# Altium PCB controller_V1.0.PcbDoc (part 2 of 8)
Units mm, origin at the board's own origin, x right, y up, seen from the top; angles counter-clockwise.
Board outline 284.13 x 175.13 mm, 4 copper layers (Top Layer, GND, VCC, Bottom Layer); 496 components, 415 nets, 1682 pads, 750 vias.
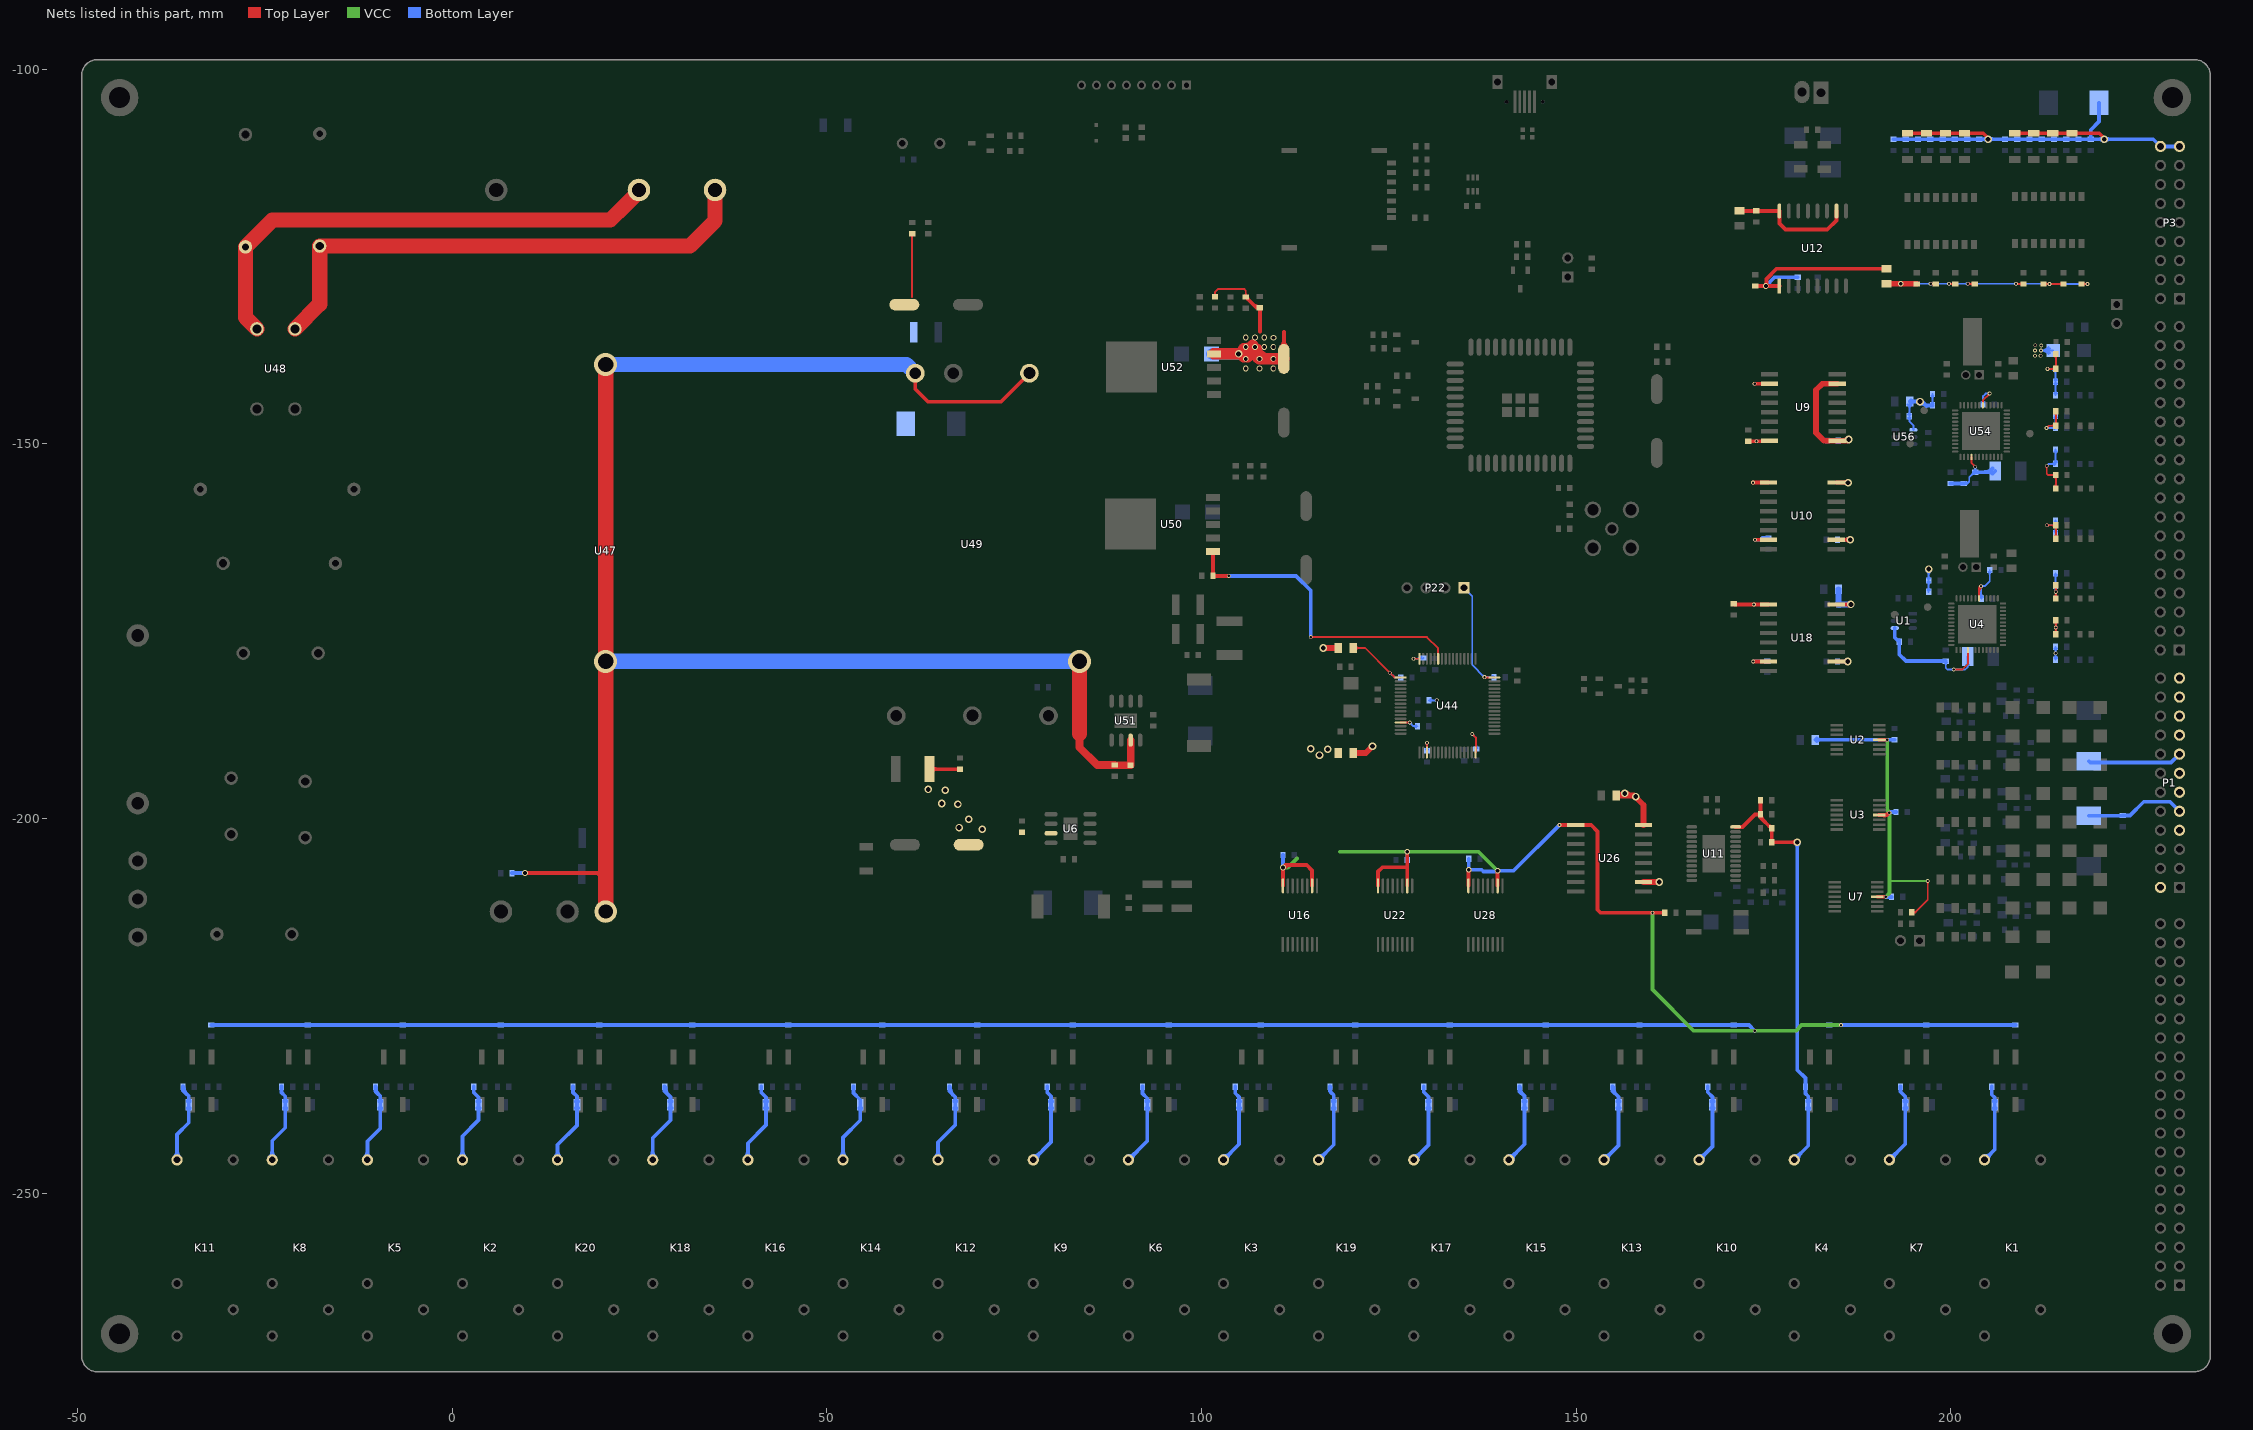
[diagram p4: the nets of this part, all layers, seen from the top]

## Via types
v1: diameter 0.508, hole 0.305, Top Layer to Bottom Layer, tented both sides, 596 vias
v2: diameter 1.016, hole 0.635, Top Layer to Bottom Layer, tented both sides, 65 vias
v3: diameter 0.6, hole 0.3, Top Layer to Bottom Layer, 50 vias
v4: diameter 0.762, hole 0.508, Top Layer to Bottom Layer, tented both sides, 29 vias
v5: diameter 2.032, hole 1.524, Top Layer to Bottom Layer, tented both sides, 4 vias
v6: diameter 3.048, hole 2.032, Top Layer to Bottom Layer, tented both sides, 3 vias
v7: diameter 1.5, hole 1, Top Layer to Bottom Layer, 2 vias
v8: diameter 2.54, hole 1.778, Top Layer to Bottom Layer, tented both sides, 1 vias

## Nets (pads, with @x,y where several pads share a name; then routed paths per layer and width w, separated by ;. In a path a pad name is that pad's centre, name@x,y a point inside that pad or via, vN(x,y) a via of type N, cw(c..) or ccw(c..) an arc to the next point about the centre after c; other vN are vias at no path point) (continued)
3.3V_ISO: C42.1 C57.1 C73.1 C146.2 C147.2 C161.2 C163.2 C166.2 D71.2 E147.1 FB5.1 FB6.1 FB7.2 R82.1 R87.1 R93.1 R97.1 R106.2 R107.2 R109.1 R114.1 R116.1 R118.1 R124.2 R127.2 R128.2 R131.2 R132.2 R135.2 R136.2 R139.2 R140.2 R142.2 R144.2 R147.2 R148.2 R150.2 R152.2 R154.2 R156.2 R158.2 R160.2 R184.2 R185.1 U9.10 U9.16 U10.1 U10.7 U16.10 U16.16 U18.1 U18.7 U22.10 U22.16 U26.1 U28.10 U28.16 U52.4 | length 478
  Top Layer w0.254: R184.2@101.651,-130.211 ccw(c101.27,-129.83) 101.809,-129.83 ccw(c102.347,-129.83) R184.2@101.966,-130.211 ; R184.2@101.809,-130.368 101.809,-129.712 102.21,-129.311 105.689,-129.311 105.915,-129.537 R185.1@105.915,-130.404 ; R185.1@105.758,-130.246 ccw(c105.377,-129.865) 105.915,-129.865 ccw(c106.454,-129.865) R185.1@106.073,-130.246 ; R97.1@195.497,-128.655 R97.1@195.501,-128.651 ; v1@197.339,-128.651 R93.1@198.016,-128.651 ; v1@197.422,-128.529 ccw(c197.716,-128.235) R93.1@197.716,-128.651 ; R93.1@197.783,-128.809 ccw(c197.402,-129.189) 197.402,-128.651 ccw(c197.402,-128.113) R93.1@197.783,-128.493 ; v1(199.771,-128.619) 199.803,-128.651 R87.1@200.607,-128.651 ; v1@199.861,-128.529 ccw(c200.155,-128.235) 200.155,-128.651 ; R87.1@200.374,-128.809 ccw(c199.993,-129.189) 199.993,-128.651 ccw(c199.993,-128.113) R87.1@200.374,-128.493 ; v1(202.286,-128.619) 203.165,-128.619 R82.1@203.197,-128.651 ; v1@202.375,-128.709 cw(c202.592,-128.926) 202.592,-128.619 cw(c202.592,-128.312) v1@202.375,-128.529 ; v1@202.507,-128.619 cw(c202.507,-129.267) R82.1@202.965,-128.809 ; 202.661,-128.619 ccw(c202.661,-128.19) R82.1@202.965,-128.493 ; v1@208.75,-128.651 R118.1@209.725,-128.651 ; v1@208.808,-128.529 ccw(c209.102,-128.235) 209.102,-128.651 ; R118.1@209.493,-128.809 ccw(c209.112,-129.189) 209.112,-128.651 ccw(c209.112,-128.113) R118.1@209.493,-128.493 ; R116.1@212.392,-128.651 v1(213.208,-128.651) R114.1@215.059,-128.651 ; R116.1@212.625,-128.809 cw(c213.006,-129.189) 213.006,-128.651 cw(c213.006,-128.113) R116.1@212.625,-128.493 ; v1@213.118,-128.741 ccw(c212.901,-128.958) 212.901,-128.651 ccw(c212.901,-128.344) v1@213.118,-128.561 ; v1@213.297,-128.741 cw(c213.514,-128.958) 213.514,-128.651 cw(c213.514,-128.344) v1@213.297,-128.561 ; R114.1@214.827,-128.809 ccw(c214.446,-129.189) 214.446,-128.651 ccw(c214.446,-128.113) R114.1@214.827,-128.493 ; R109.1@217.472,-128.651 v1(218.262,-128.651) ; R109.1@217.705,-128.809 cw(c218.086,-129.189) 218.086,-128.651 cw(c218.086,-128.113) R109.1@217.705,-128.493 ; v1@218.172,-128.741 ccw(c217.956,-128.958) 217.956,-128.651 ccw(c217.956,-128.344) v1@218.172,-128.561
  Top Layer w0.508: R185.1@105.915,-130.404 107.339,-131.827 C146.2@107.795,-131.827 107.795,-135.029 ; R185.1@106.086,-130.404 ccw(c106.499,-130.404) R185.1@106.207,-130.696 ; 106.906,-131.394 ccw(c107.72,-130.58) C146.2@107.72,-131.731 ; E147.1@110.636,-137.053 ccw(c109.769,-136.186) 110.995,-136.186 ccw(c112.222,-136.186) E147.1@111.355,-137.053 ; U16.16@110.868,-208.989 v4(110.868,-206.555) 111.227,-206.197 114.046,-206.197 114.768,-206.92 U16.10@114.768,-208.989 ; v4@110.958,-206.645 cw(c112.04,-207.727) 112.04,-206.197 ; E147.1@110.995,-138.65 110.995,-135.028 ; U22.16@123.568,-208.989 123.568,-207.089 124.155,-206.502 127.468,-206.502 ; U22.10@127.468,-208.989 127.468,-206.502 ; v4(127.468,-204.433) 127.468,-206.502 ; U28.16@135.633,-208.989 v4@135.633,-206.886 ; 135.633,-207.268 cw(c136.122,-207.268) v4@135.777,-206.922 ; U28.10@139.533,-208.989 v4(139.533,-206.973) ; v1(147.777,-200.863) U26.1@149.959,-200.863 152.019,-200.863 152.883,-201.727 152.883,-212.192 153.264,-212.573 v1(160.198,-212.573) R106.2@161.847,-212.573 ; C166.2@171.119,-171.425 U18.1@175.689,-171.425 ; C166.2@171.184,-171.279 ccw(c171.535,-170.928) 171.535,-171.425 ; C163.2@172.974,-149.633 U9.16@175.764,-149.633 ; v1(173.634,-155.169) U10.1@175.689,-155.169 ; v1(173.66,-179.045) U18.7@175.689,-179.045 ; v1(173.838,-141.961) U9.10@175.816,-141.961 ; v1(173.888,-162.789) U10.7@175.689,-162.789
  Top Layer w0.762: v2(116.256,-177.241) FB6.1@118.237,-177.241 ; FB7.2@191.44,-128.619 v4(193.345,-128.619) R97.1@195.461,-128.619
  Top Layer w1.524: U52.4@101.648,-137.983 v2(104.953,-137.983) ; v2@105.227,-137.983 cw(c105.227,-139.342) 106.187,-138.381 ; 105.615,-137.29 ccw(c107.018,-136.218) 107.018,-137.983 ; 105.649,-138.381 cw(c106.609,-139.342) 106.609,-137.983 ; 105.832,-137.983 ccw(c105.832,-135.746) 107.414,-137.328 ; 106.244,-137.256 cw(c104.953,-136.473) v2(104.953,-137.983) ; 106.834,-136.837 ccw(c107.498,-137.31) 106.922,-137.887 ; E147.1@110.995,-138.65 108.839,-138.65 107.685,-138.65 107.447,-138.412 107.018,-137.983 ; v2(104.953,-137.983) 107.018,-137.983 ; 107.066,-137.983 cw(c107.066,-139.342) 108.027,-138.381 ccw(c107.066,-139.342) 107.066,-137.983
  VCC w0.508: v4(110.868,-206.555) 111.529,-206.555 112.751,-205.334 ; 118.451,-204.433 v4(127.468,-204.433) 136.993,-204.433 v4(139.533,-206.973) ; v1(160.198,-212.573) 160.198,-222.834 165.71,-228.346 v1(173.863,-228.346) 179.349,-228.346 180.113,-227.583 v1(185.369,-227.583)
  Bottom Layer w0.254: v4(193.345,-128.619) v1(197.333,-128.619) v1(199.771,-128.619) v1(202.286,-128.619) v1(208.718,-128.619) 213.176,-128.619 v1(213.208,-128.651) v1(218.262,-128.651) ; v1@197.243,-128.709 ccw(c197.026,-128.926) 197.026,-128.619 ccw(c197.026,-128.312) v1@197.243,-128.529 ; v1@197.422,-128.709 cw(c197.639,-128.926) 197.639,-128.619 cw(c197.639,-128.312) v1@197.422,-128.529 ; v1@199.681,-128.709 ccw(c199.464,-128.926) 199.464,-128.619 ccw(c199.464,-128.312) v1@199.681,-128.529 ; v1@199.861,-128.709 cw(c200.078,-128.926) 200.078,-128.619 cw(c200.078,-128.312) v1@199.861,-128.529 ; v1@202.196,-128.709 ccw(c201.979,-128.926) 201.979,-128.619 ccw(c201.979,-128.312) v1@202.196,-128.529 ; v1@202.375,-128.709 cw(c202.592,-128.926) 202.592,-128.619 cw(c202.592,-128.312) v1@202.375,-128.529 ; v1@208.629,-128.709 ccw(c208.412,-128.926) 208.412,-128.619 ccw(c208.412,-128.312) v1@208.629,-128.529 ; v1@208.808,-128.709 cw(c209.025,-128.926) 209.025,-128.619 cw(c209.025,-128.312) v1@208.808,-128.529 ; 212.824,-128.619 cw(c212.824,-129.035) v1@213.118,-128.741 ; v1@213.297,-128.741 cw(c213.514,-128.958) 213.514,-128.651 cw(c213.514,-128.344) v1@213.297,-128.561 ; v1@218.172,-128.741 ccw(c217.956,-128.958) 217.956,-128.651 ccw(c217.956,-128.344) v1@218.172,-128.561
  Bottom Layer w0.508: R148.2@-32.159,-227.583 R144.2@-19.296,-227.583 R140.2@-6.632,-227.583 R136.2@6.484,-227.583 R132.2@19.603,-227.583 R128.2@32.029,-227.583 R124.2@44.825,-227.583 R160.2@57.383,-227.583 R158.2@70.044,-227.583 R156.2@82.832,-227.583 R154.2@95.646,-227.583 R152.2@107.901,-227.583 R150.2@120.511,-227.583 R147.2@133.147,-227.583 R142.2@145.941,-227.583 R139.2@158.47,-227.583 R135.2@171.031,-227.583 173.1,-227.583 v1(173.863,-228.346) ; v4@110.896,-206.527 C73.1@110.896,-204.876 ; C57.1@127.457,-205.537 127.468,-205.526 v4(127.468,-204.433) ; C42.1@135.687,-205.384 v4(135.687,-206.832) 137.414,-206.832 137.643,-207.061 139.446,-207.061 v4(139.533,-206.973) 141.667,-206.973 v1(147.777,-200.863) ; 139.016,-207.061 ccw(c139.016,-206.456) v4@139.444,-206.884 ; v1(173.66,-179.045) 173.687,-179.018 C161.2@175.539,-179.018 ; v1(173.888,-162.789) 174.635,-162.789 174.865,-162.559 C147.2@175.689,-162.559 ; R127.2@183.779,-227.583 v1(185.369,-227.583) R131.2@196.745,-227.583 R107.2@208.649,-227.583
  Bottom Layer w1.524: D71.2@101.358,-137.998 v2@104.785,-137.998
  other v1: 173.736,-171.425 174.092,-149.633
  other v2: 115.748,-191.541 116.865,-190.754 114.579,-190.678
  other v4: 105.918,-139.929 107.758,-139.929 109.597,-139.929 105.918,-138.65 107.758,-138.65 109.597,-138.65 105.918,-137.058 107.144,-137.058 108.371,-137.058 109.597,-137.058 109.601,-135.839 105.918,-135.788 107.144,-135.788 108.371,-135.788
3.3V_ISO_AD: D72.2 R191.2 R192.2 R193.2 R194.2 R195.2 R196.2 R197.2 R202.2 R203.2 R204.2 R205.2 R206.2 R207.2 R208.2 R209.2 R214.2 R215.2 R216.2 R217.2 R218.2 R219.2 R220.2 R221.2 R246.2 | length 74.1
  Top Layer w0.254: v1@212.737,-152.998 cw(c212.52,-153.215) 212.827,-153.215 cw(c213.133,-153.215) v1@212.916,-152.998 ; v1(212.801,-147.879) 213.106,-147.574 R204.2@214.042,-147.574 R205.2@214.042,-145.644 ; v1@212.801,-147.752 ccw(c212.801,-147.445) 213.018,-147.662 ccw(c213.235,-147.879) v1@212.928,-147.879 ; v1(212.827,-160.858) R195.2@214.042,-160.858 R194.2@214.042,-162.636 ; v1(212.827,-152.908) 212.827,-153.975 213.004,-154.153 R221.2@214.042,-154.153 R220.2@214.042,-155.956 ; v1@212.916,-160.948 cw(c213.133,-161.165) 213.133,-160.858 cw(c213.133,-160.552) v1@212.916,-160.768 ; v1(212.928,-139.979) R192.2@214.042,-139.979 R193.2@214.042,-137.998 ; v1@213.018,-140.069 cw(c213.235,-140.286) 213.235,-139.979 cw(c213.235,-139.673) v1@213.018,-139.89 ; R218.2@213.884,-175.18 ccw(c213.503,-174.799) 214.042,-174.799 ccw(c214.58,-174.799) R218.2@214.199,-175.18 ; R219.2@213.884,-173.791 cw(c213.503,-174.172) 214.042,-174.172 cw(c214.58,-174.172) R219.2@214.199,-173.791 ; R206.2@213.884,-170.405 ccw(c213.503,-170.024) 214.042,-170.024 ccw(c214.58,-170.024) R206.2@214.199,-170.405 ; R207.2@213.884,-169.092 cw(c213.503,-169.473) 214.042,-169.473 cw(c214.58,-169.473) R207.2@214.199,-169.092 ; R194.2@213.884,-162.404 ccw(c213.503,-162.023) 214.042,-162.023 ccw(c214.58,-162.023) R194.2@214.199,-162.404 ; R195.2@213.884,-161.091 cw(c213.503,-161.472) 214.042,-161.472 cw(c214.58,-161.472) R195.2@214.199,-161.091 ; R195.2@213.884,-161.016 ccw(c213.503,-161.397) 213.503,-160.858 ccw(c213.503,-160.32) R195.2@213.884,-160.701 ; R220.2@213.884,-155.723 ccw(c213.503,-155.343) 214.042,-155.343 ccw(c214.58,-155.343) R220.2@214.199,-155.723 ; R221.2@213.884,-154.385 cw(c213.503,-154.766) 214.042,-154.766 cw(c214.58,-154.766) R221.2@214.199,-154.385 ; R221.2@213.884,-154.31 ccw(c213.503,-154.691) 213.503,-154.153 ccw(c213.503,-153.614) R221.2@213.884,-153.995 ; R204.2@213.884,-147.732 ccw(c213.503,-148.112) 213.503,-147.574 ccw(c213.503,-147.036) R204.2@213.884,-147.416 ; R204.2@213.884,-147.341 ccw(c213.503,-146.961) 214.042,-146.961 ccw(c214.58,-146.961) R204.2@214.199,-147.341 ; R205.2@213.884,-145.876 cw(c213.503,-146.257) 214.042,-146.257 cw(c214.58,-146.257) R205.2@214.199,-145.876 ; R192.2@213.884,-140.137 ccw(c213.503,-140.518) 213.503,-139.979 ccw(c213.503,-139.441) R192.2@213.884,-139.822 ; R192.2@213.884,-139.747 ccw(c213.503,-139.366) 214.042,-139.366 ccw(c214.58,-139.366) R192.2@214.199,-139.747 ; R193.2@213.884,-138.231 cw(c213.503,-138.612) 214.042,-138.612 cw(c214.58,-138.612) R193.2@214.199,-138.231 ; v1@213.952,-174.588 cw(c213.735,-174.805) 214.042,-174.805 cw(c214.348,-174.805) v1@214.132,-174.588 ; v1@213.952,-174.408 ccw(c213.735,-174.191) 214.042,-174.191 ccw(c214.348,-174.191) v1@214.132,-174.408 ; v1@213.952,-169.838 cw(c213.735,-170.055) 214.042,-170.055 cw(c214.348,-170.055) v1@214.132,-169.838 ; v1@213.952,-169.658 ccw(c213.735,-169.442) 214.042,-169.442 ccw(c214.348,-169.442) v1@214.132,-169.658 ; R218.2@214.042,-175.412 R219.2@214.042,-173.558 ; R206.2@214.042,-170.637 v1(214.042,-169.748) R207.2@214.042,-168.859
  Bottom Layer w0.254: v1@212.154,-137.631 cw(c212.371,-137.848) 212.371,-137.541 cw(c212.371,-137.234) v1@212.154,-137.451 ; v1(212.801,-147.879) R208.2@214.015,-147.879 R209.2@214.015,-146.253 ; v1(212.827,-160.858) 213.99,-160.858 ; v1(212.827,-152.908) 213.081,-152.654 R216.2@214.015,-152.654 R217.2@214.015,-150.749 ; v1@212.891,-147.969 cw(c213.108,-148.185) 213.108,-147.879 cw(c213.108,-147.572) v1@212.891,-147.789 ; v1@212.916,-160.948 cw(c213.133,-161.165) 213.133,-160.858 cw(c213.133,-160.552) v1@212.916,-160.768 ; v1(212.928,-139.979) 213.487,-139.979 214.015,-140.507 R197.2@214.015,-141.707 R196.2@214.015,-143.485 ; v1@213.018,-140.069 cw(c213.235,-140.286) 213.235,-139.979 cw(c213.235,-139.673) v1@213.018,-139.89 ; D72.2@213.067,-138.007 ccw(c212.065,-138.852) v1(212.065,-137.541) ; D72.2@213.067,-137.075 cw(c212.065,-136.23) v1(212.065,-137.541) ; D72.2@213.261,-137.843 ccw(c212.611,-138.392) 212.611,-137.541 ccw(c212.611,-136.69) D72.2@213.261,-137.239 ; D72.2@213.695,-137.541 v1(212.065,-137.541) ; R214.2@213.857,-178.575 ccw(c213.477,-178.194) 214.015,-178.194 ccw(c214.553,-178.194) R214.2@214.173,-178.575 ; R215.2@213.857,-177.321 cw(c213.477,-177.702) 214.015,-177.702 cw(c214.553,-177.702) R215.2@214.173,-177.321 ; R202.2@213.857,-169.143 cw(c213.477,-169.523) 214.015,-169.523 cw(c214.553,-169.523) R202.2@214.173,-169.143 ; R202.2@213.857,-168.677 ccw(c213.477,-168.297) 214.015,-168.297 ccw(c214.553,-168.297) R202.2@214.173,-168.677 ; R203.2@213.857,-167.492 cw(c213.477,-167.872) 214.015,-167.872 cw(c214.553,-167.872) R203.2@214.173,-167.492 ; R246.2@213.857,-161.667 ccw(c213.477,-161.286) 214.015,-161.286 ccw(c214.553,-161.286) R246.2@214.173,-161.667 ; R191.2@213.857,-160.456 cw(c213.477,-160.837) 214.015,-160.837 cw(c214.553,-160.837) R191.2@214.173,-160.456 ; R216.2@213.857,-152.812 ccw(c213.477,-153.192) 213.477,-152.654 ccw(c213.477,-152.116) R216.2@213.857,-152.496 ; R216.2@213.857,-152.421 ccw(c213.477,-152.041) 214.015,-152.041 ccw(c214.553,-152.041) R216.2@214.173,-152.421 ; R217.2@213.857,-150.982 cw(c213.477,-151.362) 214.015,-151.362 cw(c214.553,-151.362) R217.2@214.173,-150.982 ; R208.2@213.857,-148.036 ccw(c213.477,-148.417) 213.477,-147.879 ccw(c213.477,-147.34) R208.2@213.857,-147.721 ; R208.2@213.857,-147.646 ccw(c213.477,-147.265) 214.015,-147.265 ccw(c214.553,-147.265) R208.2@214.173,-147.646 ; R209.2@213.857,-146.486 cw(c213.477,-146.867) 214.015,-146.867 cw(c214.553,-146.867) R209.2@214.173,-146.486 ; R196.2@213.857,-143.252 ccw(c213.477,-142.871) 214.015,-142.871 ccw(c214.553,-142.871) R196.2@214.173,-143.252 ; R197.2@213.857,-141.939 cw(c213.477,-142.32) 214.015,-142.32 cw(c214.553,-142.32) R197.2@214.173,-141.939 ; R197.2@213.857,-141.474 ccw(c213.477,-141.093) 214.015,-141.093 ccw(c214.553,-141.093) R197.2@214.173,-141.474 ; v1@213.925,-178.042 cw(c213.708,-178.259) 214.015,-178.259 cw(c214.322,-178.259) v1@214.105,-178.042 ; v1@213.925,-177.863 ccw(c213.708,-177.646) 214.015,-177.646 ccw(c214.322,-177.646) v1@214.105,-177.863 ; R214.2@214.015,-178.807 R215.2@214.015,-177.089 ; 214.015,-169.377 ccw(c214.413,-169.377) v1@214.132,-169.658 ; R203.2@214.015,-167.259 R202.2@214.015,-168.91 214.015,-169.721 v1(214.042,-169.748) ; R246.2@214.015,-161.9 R191.2@214.015,-160.223
  other v1: 214.015,-177.952 214.042,-174.498 211.277,-138.227 212.014,-138.227 211.252,-137.541 212.09,-136.855 211.303,-136.83
3.3V_MCU: C123.2 C124.2 C125.2 C126.2 C127.2 FB5.2 P22.1 R168.2 U44.13 U44.19 U44.32 U44.48 U44.64 | length 42.1
  Top Layer w0.254: U44.13@126.591,-187.178 v1(127.793,-187.178) ; v1@127.703,-187.268 ccw(c127.486,-187.485) 127.486,-187.178 ccw(c127.486,-186.872) v1@127.703,-187.088 ; v1(128.306,-178.678) U44.64@129.091,-178.678 ; v1@128.396,-178.768 cw(c128.613,-178.985) 128.613,-178.678 cw(c128.613,-178.372) v1@128.396,-178.588 ; v1@130.001,-189.988 cw(c129.784,-190.205) 130.091,-190.205 cw(c130.398,-190.205) v1@130.181,-189.988 ; U44.19@130.091,-191.178 v1(130.091,-189.898) ; v1@136.144,-188.849 cw(c136.144,-189.156) 136.361,-188.939 cw(c136.578,-188.722) v1@136.271,-188.722 ; v1(136.144,-188.722) 136.627,-189.205 136.627,-191.143 U44.32@136.591,-191.178 ; v1(137.77,-181.127) 137.82,-181.178 U44.48@139.091,-181.178 ; v1@137.859,-181.038 ccw(c138.199,-180.698) 138.199,-181.178
  Top Layer w0.762: FB5.2@120.237,-191.262 121.92,-191.262 v2(122.834,-190.348)
  Bottom Layer w0.254: v1@127.793,-187.305 cw(c127.793,-187.612) 128.01,-187.395 cw(c128.227,-187.178) v1@127.92,-187.178 ; v1(127.793,-187.178) 128.295,-187.681 ; v1(128.306,-178.678) 129.521,-178.678 C127.2@129.614,-178.586 ; v1@128.396,-178.768 cw(c128.613,-178.985) 128.613,-178.678 cw(c128.613,-178.372) v1@128.396,-178.588 ; C125.2@128.665,-187.836 ccw(c128.295,-188.197) 128.295,-187.681 ; C125.2@128.665,-187.525 cw(c128.295,-187.164) 128.295,-187.681 ; 128.778,-178.678 ccw(c128.778,-177.825) C127.2@129.381,-178.428 ; C125.2@128.825,-187.681 128.295,-187.681 ; C123.2@129.941,-190.798 ccw(c129.579,-190.436) 130.091,-190.436 ; v1@130.001,-189.988 cw(c129.784,-190.205) 130.091,-190.205 cw(c130.398,-190.205) v1@130.181,-189.988 ; 130.091,-190.399 ccw(c130.656,-190.399) C123.2@130.256,-190.798 ; v1(130.091,-189.898) 130.091,-190.948 C123.2@130.099,-190.956 ; R168.2@130.377,-184.226 v1(131.42,-184.226) ; R168.2@130.535,-184.384 cw(c130.915,-184.765) 130.915,-184.226 cw(c130.915,-183.688) R168.2@130.535,-184.069 ; v1@131.33,-184.316 ccw(c131.113,-184.533) 131.113,-184.226 ccw(c131.113,-183.92) v1@131.33,-184.136 ; P22.1@135.049,-169.215 136.144,-170.31 136.144,-179.502 v1(137.77,-181.127) C126.2@139.064,-181.127 ; v1@136.144,-188.849 cw(c136.144,-189.156) 136.361,-188.939 cw(c136.578,-188.722) v1@136.271,-188.722 ; v1(136.144,-188.722) 136.677,-189.255 C124.2@136.677,-190.727 ; C124.2@136.52,-190.57 ccw(c136.139,-190.189) 136.677,-190.189 ccw(c137.216,-190.189) C124.2@136.835,-190.57 ; v1@137.643,-181.127 ccw(c137.336,-181.127) 137.553,-180.911 ccw(c137.77,-180.694) v1@137.77,-181 ; v1@137.859,-181.217 cw(c138.076,-181.434) 138.076,-181.127 cw(c138.076,-180.821) v1@137.859,-181.038 ; C126.2@138.906,-181.285 ccw(c138.525,-181.666) 138.525,-181.127 ccw(c138.525,-180.589) C126.2@138.906,-180.97
3.3V_MCU_AD: C128.2 FB6.2 U44.1 | length 13.8
  Top Layer w0.254: FB6.2@120.237,-177.241 121.844,-177.241 v1(125.143,-180.54) 125.781,-181.178 U44.1@126.591,-181.178 ; FB6.2@120.501,-177.505 cw(c121.137,-178.142) 121.137,-177.241 cw(c121.137,-176.341) FB6.2@120.501,-176.977 ; v1@125.016,-180.54 ccw(c124.709,-180.54) 124.926,-180.323 ccw(c125.143,-180.106) v1@125.143,-180.413 ; v1@125.143,-180.667 cw(c125.143,-180.974) 125.359,-180.757 cw(c125.576,-180.54) v1@125.27,-180.54 ; 125.628,-181.026 ccw(c125.941,-180.713) U44.1@125.941,-181.155
  Bottom Layer w0.254: v1@125.143,-180.667 cw(c125.143,-180.974) 125.359,-180.757 cw(c125.576,-180.54) v1@125.27,-180.54 ; v1(125.143,-180.54) 125.781,-181.178 C128.2@126.615,-181.178 ; C128.2@126.457,-181.336 ccw(c126.077,-181.717) 126.077,-181.178 ccw(c126.077,-180.64) C128.2@126.457,-181.021
3.8V_EN: R183.2 U44.59 U50.1 | length 43.5
  Top Layer w0.254: v1@114.669,-175.883 cw(c114.886,-176.1) 114.886,-175.793 cw(c114.886,-175.487) v1@114.669,-175.704 ; v1@114.681,-175.895 v1(114.579,-175.793) 130.092,-175.793 131.591,-177.292 U44.59@131.591,-178.678
  Top Layer w0.508: U50.1@101.365,-164.494 cw(c100.923,-164.936) 101.548,-164.936 ; U50.1@101.521,-164.338 101.548,-164.365 R183.2@101.548,-167.615 v1(103.632,-167.615)
  Bottom Layer w0.508: v1(103.632,-167.615) 112.624,-167.615 114.579,-169.57 v1(114.579,-175.793)
5V_F: C47.2 C49.2 C58.2 FB4.2 R24.2 U2.4 U3.4 U7.4 | length 52.7
  Top Layer w0.254: R24.2@194.819,-212.522 195.301,-212.522 ; R24.2@194.99,-212.666 cw(c195.301,-212.929) 195.301,-212.522 ; R24.2@194.99,-212.378 ccw(c195.301,-212.114) 195.301,-212.522 ; v1@196.862,-208.421 cw(c196.645,-208.637) 196.952,-208.637 cw(c197.258,-208.637) v1@197.041,-208.421 ; v1(196.952,-208.331) 196.952,-210.871 195.301,-212.522
  Top Layer w0.508: U7.4@190.193,-210.447 v1(191.33,-210.447) ; U3.4@190.447,-199.525 191.533,-199.525 v1(191.821,-199.238) cw(c191.126,-198.543) U3.4@191.126,-199.525 ; U2.4@190.447,-189.492 v1(191.533,-189.492) ; U3.4@191.107,-199.602 ccw(c191.107,-198.757) v1@191.704,-199.354
  VCC w0.254: 191.897,-208.331 v1(196.952,-208.331) ; v1@196.862,-208.421 ccw(c196.645,-208.637) 196.645,-208.331 ccw(c196.645,-208.024) v1@196.862,-208.241
  VCC w0.508: v1(191.33,-210.447) 191.821,-209.956 v1(191.821,-199.238) ; 191.533,-198.543 ccw(c192.516,-198.543) v1(191.821,-199.238) ; v1(191.533,-189.492) 191.533,-198.95 v1(191.821,-199.238)
  Bottom Layer w0.508: FB4.2@181.976,-189.492 v1(191.533,-189.492) ; FB4.2@182.133,-189.683 cw(c182.594,-190.144) 182.594,-189.492 ; FB4.2@182.133,-189.335 ccw(c182.512,-188.957) 182.512,-189.492 ; v1(191.33,-210.447) 191.347,-210.464 C58.2@192.099,-210.464 ; v1@191.54,-189.485 C49.2@192.507,-189.485 ; 192.066,-199.136 ccw(c192.066,-199.483) v1(191.821,-199.238) 191.922,-199.136 C47.2@192.708,-199.136
5VA: C2.2 C84.2 C85.2 C86.2 C121.2 C133.2 C157.2 E13.1 E14.1 FB2.2 R19.1 R20.1 R73.1 R75.1 R189.1 R190.1 U1.4 U4.6 U4.28 U54.6 U54.28 U56.4 | length 78.9
  Top Layer w0.254: v1(200.406,-180.111) 201.574,-180.111 202.295,-179.391 U4.28@202.295,-177.516 ; v1@200.496,-180.201 cw(c200.713,-180.418) 200.713,-180.111 cw(c200.713,-179.805) v1@200.496,-180.022 ; U54.28@202.803,-151.735 202.803,-152.562 v1@203.276,-153.035 ; v1@203.164,-153.05 ccw(c202.857,-153.05) 203.074,-152.833 ccw(c203.291,-152.616) v1@203.291,-152.923 ; U4.6@203.795,-170.616 203.795,-169.255 v1(204.064,-168.986) ; 203.795,-169.941 cw(c205.019,-169.941) v1@204.153,-169.076 ; 203.795,-169.328 cw(c204.405,-169.328) v1@203.974,-168.896 ; v1@203.937,-168.986 cw(c203.63,-168.986) 203.847,-169.203 cw(c204.064,-169.42) v1@204.064,-169.113 ; U54.6@204.303,-144.835 204.303,-144.185 v1(205.207,-143.281) ; v1@205.08,-143.281 cw(c204.773,-143.281) 204.99,-143.498 cw(c205.207,-143.715) v1@205.207,-143.408
  Bottom Layer w0.254: FB2.2@194.268,-144.762 cw(c193.731,-145.299) 194.491,-145.299 ; C157.2@194.333,-146.537 cw(c193.952,-146.917) 194.491,-146.917 cw(c195.029,-146.917) C157.2@194.648,-146.537 ; C157.2@194.333,-146.071 ccw(c193.952,-145.691) 194.491,-145.691 ccw(c195.029,-145.691) C157.2@194.648,-146.071 ; 194.491,-145.499 cw(c195.532,-145.499) FB2.2@194.796,-144.762 ; FB2.2@194.491,-144.39 C157.2@194.491,-146.304 194.491,-146.967 195.027,-147.504 U56.4@195.027,-148.123 ; U56.4@194.94,-148.036 ccw(c194.73,-147.826) 195.027,-147.826 ccw(c195.324,-147.826) U56.4@195.114,-148.036 ; v2@196.799,-166.98 cw(c196.148,-167.631) 197.068,-167.631 cw(c197.988,-167.631) v2@197.337,-166.98 ; R73.1@196.91,-169.516 ccw(c196.53,-169.135) 197.068,-169.135 ccw(c197.606,-169.135) R73.1@197.226,-169.516 ; R20.1@196.91,-168.457 cw(c196.53,-168.838) 197.068,-168.838 cw(c197.606,-168.838) R20.1@197.226,-168.457 ; R20.1@196.91,-167.992 ccw(c196.53,-167.611) 197.068,-167.611 ccw(c197.606,-167.611) R20.1@197.226,-167.992 ; R73.1@197.068,-169.748 R20.1@197.068,-168.224 v2(197.068,-166.711) ; R75.1@197.418,-144.624 ccw(c197.038,-144.243) 197.576,-144.243 ccw(c198.114,-144.243) R75.1@197.734,-144.624 ; R190.1@197.418,-143.565 cw(c197.038,-143.946) 197.576,-143.946 cw(c198.114,-143.946) R190.1@197.734,-143.565 ; R75.1@197.576,-144.856 R190.1@197.576,-143.332 ; C84.2@199.196,-179.153 cw(c198.816,-179.534) 199.354,-179.534 cw(c199.892,-179.534) C84.2@199.512,-179.153 ; C84.2@199.354,-178.995 199.354,-179.898 199.568,-180.111 v1(200.406,-180.111) 201.955,-180.111 202.275,-179.792 ; v1@200.316,-180.201 ccw(c200.099,-180.418) 200.099,-180.111 ccw(c200.099,-179.805) v1@200.316,-180.022 ; v1@200.496,-180.201 cw(c200.713,-180.418) 200.713,-180.111 cw(c200.713,-179.805) v1@200.496,-180.022 ; R19.1@201.767,-155.27 202.26,-155.27 202.489,-155.042 ; R19.1@201.824,-155.296 ccw(c202.026,-155.007) 202.274,-155.256 ; R19.1@201.97,-155.087 ccw(c202.202,-154.755) 202.489,-155.042 ; E14.1@202.062,-179.491 cw(c201.955,-179.792) 202.275,-179.792 ; E14.1@202.275,-178.384 202.275,-179.792 ; E14.1@202.488,-179.491 ccw(c202.595,-179.792) 202.275,-179.792 ; 202.724,-154.197 cw(c203.216,-154.689) C85.2@203.216,-153.993 ; C85.2@202.882,-154.039 ccw(c202.613,-153.77) C85.2@202.993,-153.77 ; C85.2@203.133,-153.613 ccw(c202.753,-153.232) 203.291,-153.232 ccw(c203.829,-153.232) C85.2@203.449,-153.613 ; v1@203.201,-153.14 cw(c202.984,-153.356) 203.291,-153.356 cw(c203.598,-153.356) v1@203.381,-153.14 ; v1(203.291,-153.05) C85.2@203.291,-153.77 203.151,-153.77 202.489,-154.432 202.489,-155.042 ; v1@203.974,-169.076 cw(c203.757,-169.293) 204.064,-169.293 cw(c204.37,-169.293) 204.153,-169.076 cw(c204.37,-169.293) 204.37,-168.986 cw(c204.37,-168.68) v1@204.153,-168.896 ; C121.2@203.981,-170.43 ccw(c203.781,-170.23) 204.064,-170.23 ; 204.064,-169.869 ccw(c204.857,-169.869) C121.2@204.296,-170.43 ; C121.2@204.138,-170.663 204.064,-170.588 v1(204.064,-168.986) 204.572,-168.986 205.22,-168.338 C133.2@205.22,-166.827 ; C86.2@204.173,-144.497 ccw(c203.793,-144.116) 204.331,-144.116 ccw(c204.869,-144.116) C86.2@204.489,-144.497 ; C86.2@204.331,-144.729 204.331,-143.624 204.673,-143.281 v1(205.207,-143.281) ; C133.2@205.062,-167.06 cw(c204.682,-167.441) 205.22,-167.441 cw(c205.758,-167.441) C133.2@205.378,-167.06 ; v1@205.117,-143.371 ccw(c204.9,-143.588) 204.9,-143.281 ccw(c204.9,-142.975) v1@205.117,-143.192
  Bottom Layer w0.508: U1.4@192.549,-174.584 192.549,-175.839 C2.2@193.138,-176.428 193.138,-178.101 194.032,-178.995 C84.2@199.354,-178.995 ; C2.2@192.846,-176.136 ccw(c193.138,-175.845) C2.2@193.138,-176.257 ; FB2.2@194.532,-144.348 196.19,-144.348 196.698,-144.856 R75.1@197.576,-144.856 ; FB2.2@194.706,-144.522 cw(c195.126,-144.942) 195.126,-144.348 cw(c195.126,-143.754) FB2.2@194.706,-144.174 ; v2@195.731,-144.528 ccw(c195.297,-144.961) 195.297,-144.348 ccw(c195.297,-143.735) v2@195.731,-144.169 ; v2@195.91,-144.602 cw(c195.91,-145.89) 196.821,-144.979 ; R189.1@199.989,-155.27 R19.1@201.767,-155.27 ; C85.2@203.291,-153.77 205.807,-153.77 E13.1@205.958,-153.619 ; 204.367,-153.77 ccw(c204.367,-152.028) E13.1@205.599,-153.26 ; 205.096,-153.77 cw(c205.096,-154.481) E13.1@205.599,-153.978
  other v2: 195.91,-144.348
5VD_F: C138.2 C160.2 C164.2 C165.2 FB1.2 FB3.2 U9.1 U9.7 U10.10 U10.16 U18.10 U18.16 U26.10 U26.16 | length 47.6
  Top Layer w0.508: U18.10@184.732,-179.045 v2(186.284,-179.045) ; U18.16@184.732,-171.425 v2(186.69,-171.425) ; U10.10@184.732,-162.789 v2(186.588,-162.789) ; U10.16@184.732,-155.169 v2(186.309,-155.169) ; v2@186.104,-179.224 ccw(c185.67,-179.658) 185.67,-179.045 ccw(c185.67,-178.431) v2@186.104,-178.865 ; v2@186.129,-155.348 ccw(c185.696,-155.782) 185.696,-155.169 ccw(c185.696,-154.555) v2@186.129,-154.989 ; v2@186.409,-162.968 ccw(c185.975,-163.402) 185.975,-162.789 ccw(c185.975,-162.175) v2@186.409,-162.609 ; v2@186.51,-171.604 ccw(c186.077,-172.038) 186.077,-171.425 ccw(c186.077,-170.811) v2@186.51,-171.245
  Top Layer w0.762: FB1.2@155.337,-196.926 157.734,-196.926 159.001,-198.194 U26.16@159.001,-200.863 ; FB1.2@155.534,-196.926 ccw(c155.534,-195.666) v2@156.425,-196.557 ; v2@156.605,-196.557 ccw(c157.496,-195.666) v2@157.496,-196.926 ; 157.288,-196.926 cw(c157.288,-197.753) v2@157.873,-197.168 ; U26.10@159.001,-208.483 v2(161.112,-208.483) ; U9.7@184.859,-141.961 182.88,-141.961 182.042,-142.799 182.042,-148.514 183.109,-149.581 U9.1@184.859,-149.581 186.233,-149.581 v2(186.401,-149.413) ; U9.1@185.689,-149.581 ccw(c185.689,-148.701) v2@186.311,-149.323
  Bottom Layer w0.508: C164.2@184.913,-179.045 v2(186.284,-179.045) ; C160.2@184.913,-162.789 v2(186.588,-162.789) ; C138.2@185.015,-149.581 v2@186.233,-149.581 ; 185.382,-149.581 ccw(c185.382,-148.394) v2@186.221,-149.233 ; v2@186.104,-179.224 ccw(c185.67,-179.658) 185.67,-179.045 ccw(c185.67,-178.431) v2@186.104,-178.865 ; v2@186.409,-162.968 ccw(c185.975,-163.402) 185.975,-162.789 ccw(c185.975,-162.175) v2@186.409,-162.609
  Bottom Layer w0.762: FB3.2@185.032,-169.393 185.04,-169.401 C165.2@185.04,-171.425 v2(186.69,-171.425)
  other v2: 157.963,-197.079 156.515,-196.647
24V_F: C35.2 C36.2 C37.2 C54.2 C56.1 C63.1 C65.1 C76.1 C78.1 C79.1 C80.1 C96.2 C108.1 C167.2 D15.1 D39.1 D41.1 D43.1 D45.1 D46.1 D47.1 D48.1 D49.1 D50.1 D51.1 D52.2 D53.1 D54.1 D55.1 D56.1 D57.1 D58.1 D59.1 D60.1 D61.1 D62.1 D63.1 D64.1 D65.1 D66.1 D67.1 D68.1 D75.2 D76.2 D77.1 E138.1 F4.2 K1.4 K2.4 K3.4 K4.4 K5.4 K6.4 K7.4 K8.4 K9.4 K10.4 K11.4 K12.4 K13.4 K14.4 K15.4 K16.4 K17.4 K18.4 K19.4 K20.4 P1.2 P1.7 P1.9 P1.11 P1.13 P1.15 P1.17 P1.19 P1.21 P1.23 P3.17 P3.18 R81.2 R86.2 R92.2 R96.2 R108.2 R113.2 R115.2 R117.2 R122.2 R123.2 R125.2 R126.2 R129.2 R130.2 R133.2 R134.2 R137.2 R138.2 R141.2 R143.2 R145.2 R146.2 R149.2 R151.2 R153.2 R155.2 R157.2 R159.2 R179.2 U6.7 U11.24 | length 454.9
  Top Layer w0.508: F4.2@63.679,-193.396 63.706,-193.422 C54.2@67.765,-193.422 ; F4.2@63.959,-193.676 cw(c64.571,-194.287) 64.571,-193.422 ; F4.2@63.959,-193.116 ccw(c64.7,-192.375) 64.7,-193.422 ; U11.24@171.299,-201.124 172.231,-201.124 173.905,-199.449 C36.2@174.621,-199.449 ; C37.2@174.621,-197.587 C36.2@174.621,-199.449 ; C36.2@174.717,-199.524 ccw(c175.78,-199.524) 175.028,-200.276 ; 175.732,-200.98 ccw(c176.121,-200.591) C96.2@176.121,-201.141 ; v2@179.348,-203.354 ccw(c178.914,-203.788) 178.914,-203.175 ccw(c178.914,-202.561) v2@179.348,-202.995 ; v2(179.527,-203.175) C35.2@176.121,-203.175 C96.2@176.121,-201.312 176.064,-201.312 174.621,-199.869 C36.2@174.621,-199.449 ; D43.1@194.234,-108.537 D41.1@196.774,-108.537 D39.1@199.314,-108.537 D15.1@201.854,-108.537 204.346,-108.537 v2@205.13,-109.322 ; D43.1@194.672,-108.675 cw(c195.007,-109.01) 195.007,-108.537 cw(c195.007,-108.064) D43.1@194.672,-108.398 ; D41.1@196.335,-108.675 ccw(c196.001,-109.01) 196.001,-108.537 ccw(c196.001,-108.064) D41.1@196.335,-108.398 ; D41.1@197.212,-108.675 cw(c197.547,-109.01) 197.547,-108.537 cw(c197.547,-108.064) D41.1@197.212,-108.398 ; D39.1@198.875,-108.675 ccw(c198.541,-109.01) 198.541,-108.537 ccw(c198.541,-108.064) D39.1@198.875,-108.398 ; D39.1@199.752,-108.675 cw(c200.087,-109.01) 200.087,-108.537 cw(c200.087,-108.064) D39.1@199.752,-108.398 ; D15.1@201.415,-108.675 ccw(c201.081,-109.01) 201.081,-108.537 ccw(c201.081,-108.064) D15.1@201.415,-108.398 ; D15.1@202.292,-108.675 cw(c202.627,-109.01) 202.627,-108.537 cw(c202.627,-108.064) D15.1@202.292,-108.398 ; D48.1@208.559,-108.537 D47.1@211.101,-108.537 D46.1@213.644,-108.537 D45.1@216.186,-108.537 219.84,-108.537 v2@220.624,-109.322 ; D48.1@208.998,-108.675 cw(c209.333,-109.01) 209.333,-108.537 cw(c209.333,-108.064) D48.1@208.998,-108.398 ; D47.1@210.663,-108.675 ccw(c210.328,-109.01) 210.328,-108.537 ccw(c210.328,-108.064) D47.1@210.663,-108.398 ; D47.1@211.54,-108.675 cw(c211.875,-109.01) 211.875,-108.537 cw(c211.875,-108.064) D47.1@211.54,-108.398 ; D46.1@213.205,-108.675 ccw(c212.87,-109.01) 212.87,-108.537 ccw(c212.87,-108.064) D46.1@213.205,-108.398 ; D46.1@214.082,-108.675 cw(c214.417,-109.01) 214.417,-108.537 cw(c214.417,-108.064) D46.1@214.082,-108.398 ; D45.1@215.747,-108.675 ccw(c215.412,-109.01) 215.412,-108.537 ccw(c215.412,-108.064) D45.1@215.747,-108.398 ; D45.1@216.624,-108.675 cw(c216.959,-109.01) 216.959,-108.537 cw(c216.959,-108.064) D45.1@216.624,-108.398
  Bottom Layer w0.508: K11.4@-37.089,-245.216 ccw(c-37.935,-244.37) -36.738,-244.37 ccw(c-35.541,-244.37) K11.4@-36.387,-245.216 ; K11.4@-36.738,-245.567 -36.738,-242.173 -35.179,-240.614 D62.1@-35.179,-238.201 -35.179,-237.058 -35.945,-236.292 R146.2@-35.945,-235.788 ; R146.2@-35.849,-235.863 ccw(c-34.582,-235.863) -35.478,-236.759 ; D62.1@-35.318,-238.64 cw(c-35.652,-238.974) -35.179,-238.974 cw(c-34.706,-238.974) D62.1@-35.04,-238.64 ; D62.1@-35.318,-237.763 ccw(c-35.652,-237.428) -35.179,-237.428 ccw(c-34.706,-237.428) D62.1@-35.04,-237.763 ; K8.4@-24.391,-245.216 ccw(c-25.238,-244.37) -24.04,-244.37 ccw(c-22.843,-244.37) K8.4@-23.69,-245.216 ; K8.4@-24.04,-245.567 -24.04,-243.014 -22.302,-241.276 D60.1@-22.302,-238.201 -22.302,-237.083 -22.814,-236.571 R143.2@-22.814,-235.788 ; D60.1@-22.441,-238.64 cw(c-22.775,-238.974) -22.302,-238.974 cw(c-21.829,-238.974) D60.1@-22.164,-238.64 ; D60.1@-22.441,-237.763 ccw(c-22.775,-237.428) -22.302,-237.428 ccw(c-21.829,-237.428) D60.1@-22.164,-237.763 ; K5.4@-11.693,-245.216 ccw(c-12.54,-244.37) -11.343,-244.37 ccw(c-10.145,-244.37) K5.4@-10.992,-245.216 ; K5.4@-11.343,-245.567 -11.343,-243.092 -9.626,-241.375 D58.1@-9.626,-238.201 -9.626,-237.059 -10.265,-236.42 R138.2@-10.265,-235.788 ; R138.2@-10.171,-235.883 ccw(c-9.209,-236.086) -9.904,-236.781 ; D58.1@-9.764,-238.64 cw(c-10.099,-238.974) -9.626,-238.974 cw(c-9.152,-238.974) D58.1@-9.487,-238.64 ; D58.1@-9.764,-237.763 ccw(c-10.099,-237.428) -9.626,-237.428 ccw(c-9.152,-237.428) D58.1@-9.487,-237.763 ; K2.4@1.004,-245.216 ccw(c0.158,-244.37) 1.355,-244.37 ccw(c2.553,-244.37) K2.4@1.706,-245.216 ; K2.4@1.355,-245.567 1.355,-242.409 3.504,-240.26 D56.1@3.504,-238.201 3.504,-237.21 2.865,-236.571 R134.2@2.865,-235.788 ; D56.1@3.366,-238.64 cw(c3.031,-238.974) 3.504,-238.974 cw(c3.977,-238.974) D56.1@3.643,-238.64 ; D56.1@3.366,-237.763 ccw(c3.031,-237.428) 3.504,-237.428 ccw(c3.977,-237.428) D56.1@3.643,-237.763 ; K20.4@13.702,-245.216 ccw(c12.855,-244.37) 14.053,-244.37 ccw(c15.25,-244.37) K20.4@14.404,-245.216 ; K20.4@14.053,-245.567 14.053,-243.554 16.636,-240.971 D54.1@16.636,-238.201 16.636,-237.083 16.124,-236.571 R130.2@16.124,-235.788 ; D54.1@16.497,-238.64 cw(c16.163,-238.974) 16.636,-238.974 cw(c17.109,-238.974) D54.1@16.775,-238.64 ; D54.1@16.497,-237.763 ccw(c16.163,-237.428) 16.636,-237.428 ccw(c17.109,-237.428) D54.1@16.775,-237.763 ; K18.4@26.4,-245.216 ccw(c25.553,-244.37) 26.751,-244.37 ccw(c27.948,-244.37) K18.4@27.101,-245.216 ; K18.4@26.751,-245.567 26.751,-242.642 29.107,-240.285 D77.1@29.107,-238.201 29.107,-237.159 28.341,-236.393 R126.2@28.341,-235.788 ; R126.2@28.437,-235.866 ccw(c29.823,-235.914) 28.843,-236.894 ; D77.1@28.969,-238.64 cw(c28.634,-238.974) 29.107,-238.974 cw(c29.581,-238.974) D77.1@29.246,-238.64 ; D77.1@28.969,-237.763 ccw(c28.634,-237.428) 29.107,-237.428 ccw(c29.581,-237.428) D77.1@29.246,-237.763 ; K16.4@39.098,-245.216 ccw(c38.251,-244.37) 39.448,-244.37 ccw(c40.646,-244.37) K16.4@39.799,-245.216 ; K16.4@39.448,-245.567 39.448,-243.355 41.886,-240.918 D50.1@41.886,-238.201 41.886,-237.212 41.247,-236.573 R123.2@41.247,-235.788 ; D50.1@41.747,-238.64 cw(c41.412,-238.974) 41.886,-238.974 cw(c42.359,-238.974) D50.1@42.024,-238.64 ; D50.1@41.747,-237.763 ccw(c41.412,-237.428) 41.886,-237.428 ccw(c42.359,-237.428) D50.1@42.024,-237.763 ; K14.4@51.795,-245.216 ccw(c50.949,-244.37) 52.146,-244.37 ccw(c53.344,-244.37) K14.4@52.497,-245.216 ; K14.4@52.146,-245.567 52.146,-242.596 54.457,-240.285 D68.1@54.457,-238.201 54.457,-237.54 53.564,-236.647 R159.2@53.564,-235.788 ; D68.1@54.318,-238.64 cw(c53.983,-238.974) 54.457,-238.974 cw(c54.93,-238.974) D68.1@54.595,-238.64 ; K12.4@64.493,-245.216 ccw(c63.646,-244.37) 64.844,-244.37 ccw(c66.041,-244.37) K12.4@65.195,-245.216 ; K12.4@64.844,-245.567 64.844,-243.207 67.131,-240.92 D67.1@67.131,-238.201 67.131,-237.184 66.365,-236.418 R157.2@66.365,-235.788 ; R157.2@66.461,-235.869 ccw(c67.808,-235.952) 66.854,-236.907 ; D67.1@66.993,-238.64 cw(c66.658,-238.974) 67.131,-238.974 cw(c67.604,-238.974) D67.1@67.27,-238.64 ; D67.1@66.993,-237.763 ccw(c66.658,-237.428) 67.131,-237.428 ccw(c67.604,-237.428) D67.1@67.27,-237.763 ; K9.4@77.542,-245.567 79.933,-243.176 D66.1@79.933,-238.201 79.933,-237.083 79.421,-236.571 R155.2@79.421,-235.788 ; K9.4@77.542,-245.071 ccw(c77.542,-243.874) 78.388,-244.72 ccw(c79.235,-245.567) K9.4@78.038,-245.567 ; D66.1@79.794,-238.64 cw(c79.46,-238.974) 79.933,-238.974 cw(c80.406,-238.974) D66.1@80.071,-238.64 ; D66.1@79.794,-237.763 ccw(c79.46,-237.428) 79.933,-237.428 ccw(c80.406,-237.428) D66.1@80.071,-237.763 ; K6.4@90.239,-245.567 92.76,-243.047 D65.1@92.76,-238.201 92.76,-237.337 92.121,-236.698 R153.2@92.121,-235.788 ; K6.4@90.239,-245.071 ccw(c90.239,-243.874) 91.086,-244.72 ccw(c91.933,-245.567) K6.4@90.735,-245.567 ; D65.1@92.621,-238.64 cw(c92.287,-238.974) 92.76,-238.974 cw(c93.233,-238.974) D65.1@92.898,-238.64 ; D65.1@92.621,-237.763 ccw(c92.287,-237.428) 92.76,-237.428 ccw(c93.233,-237.428) D65.1@92.898,-237.763 ; K3.4@102.937,-245.567 105.028,-243.476 D64.1@105.028,-238.201 105.028,-237.184 104.516,-236.672 R151.2@104.516,-235.788 ; K3.4@102.937,-245.071 ccw(c102.937,-243.874) 103.784,-244.72 ccw(c104.63,-245.567) K3.4@103.433,-245.567 ; D64.1@104.889,-238.64 cw(c104.555,-238.974) 105.028,-238.974 cw(c105.501,-238.974) D64.1@105.167,-238.64 ; D64.1@104.889,-237.763 ccw(c104.555,-237.428) 105.028,-237.428 ccw(c105.501,-237.428) D64.1@105.167,-237.763 ; K19.4@115.635,-245.567 117.652,-243.55 D63.1@117.652,-238.201 117.652,-236.93 117.14,-236.418 R149.2@117.14,-235.788 ; K19.4@115.635,-245.071 ccw(c115.635,-243.874) 116.481,-244.72 ccw(c117.328,-245.567) K19.4@116.131,-245.567 ; R149.2@117.228,-235.901 ccw(c117.859,-236.168) 117.374,-236.653 ; D63.1@117.513,-238.64 cw(c117.179,-238.974) 117.652,-238.974 cw(c118.125,-238.974) D63.1@117.79,-238.64 ; D63.1@117.513,-237.763 ccw(c117.179,-237.428) 117.652,-237.428 ccw(c118.125,-237.428) D63.1@117.79,-237.763 ; K17.4@128.332,-245.567 130.301,-243.599 D61.1@130.301,-238.201 130.301,-237.133 129.662,-236.494 R145.2@129.662,-235.788 ; K17.4@128.332,-245.071 ccw(c128.332,-243.874) 129.179,-244.72 ccw(c130.026,-245.567) K17.4@128.828,-245.567 ; D61.1@130.162,-238.64 cw(c129.828,-238.974) 130.301,-238.974 cw(c130.774,-238.974) D61.1@130.44,-238.64 ; D61.1@130.162,-237.763 ccw(c129.828,-237.428) 130.301,-237.428 ccw(c130.774,-237.428) D61.1@130.44,-237.763 ; K15.4@141.03,-245.567 143.108,-243.49 D59.1@143.108,-238.201 143.108,-237.062 142.469,-236.423 R141.2@142.469,-235.788 ; K15.4@141.03,-245.071 ccw(c141.03,-243.874) 141.877,-244.72 ccw(c142.724,-245.567) K15.4@141.526,-245.567 ; R141.2@142.563,-235.883 ccw(c143.52,-236.09) 142.828,-236.782 ; D59.1@142.969,-238.64 cw(c142.635,-238.974) 143.108,-238.974 cw(c143.581,-238.974) D59.1@143.246,-238.64 ; D59.1@142.969,-237.763 ccw(c142.635,-237.428) 143.108,-237.428 ccw(c143.581,-237.428) D59.1@143.246,-237.763 ; K13.4@153.728,-245.567 155.65,-243.645 D57.1@155.65,-238.201 155.65,-237.133 154.884,-236.367 R137.2@154.884,-235.788 ; K13.4@153.728,-245.071 ccw(c153.728,-243.874) 154.575,-244.72 ccw(c155.421,-245.567) K13.4@154.224,-245.567 ; R137.2@154.98,-235.864 ccw(c156.407,-235.872) 155.398,-236.881 ; D57.1@155.512,-238.64 cw(c155.177,-238.974) 155.65,-238.974 cw(c156.123,-238.974) D57.1@155.789,-238.64 ; D57.1@155.512,-237.763 ccw(c155.177,-237.428) 155.65,-237.428 ccw(c156.123,-237.428) D57.1@155.789,-237.763 ; K10.4@166.426,-245.567 168.225,-243.768 D55.1@168.225,-238.201 168.225,-237.186 167.586,-236.547 R133.2@167.586,-235.788 ; K10.4@166.426,-245.071 ccw(c166.426,-243.874) 167.272,-244.72 ccw(c168.119,-245.567) K10.4@166.922,-245.567 ; D55.1@168.087,-238.64 cw(c167.752,-238.974) 168.225,-238.974 cw(c168.698,-238.974) D55.1@168.364,-238.64 ; D55.1@168.087,-237.763 ccw(c167.752,-237.428) 168.225,-237.428 ccw(c168.698,-237.428) D55.1@168.364,-237.763 ; K4.4@179.123,-245.567 180.999,-243.691 D51.1@180.999,-238.201 180.999,-237.083 180.614,-236.698 R125.2@180.614,-235.788 180.614,-234.656 179.527,-233.569 v2(179.527,-203.175) ; K4.4@179.123,-245.071 ccw(c179.123,-243.874) 179.97,-244.72 ccw(c180.817,-245.567) K4.4@179.619,-245.567 ; v2@179.348,-203.354 cw(c178.914,-203.788) 179.527,-203.788 cw(c180.14,-203.788) v2@179.707,-203.354 ; D51.1@180.861,-238.64 cw(c180.526,-238.974) 180.999,-238.974 cw(c181.473,-238.974) D51.1@181.138,-238.64 ; D51.1@180.861,-237.763 ccw(c180.526,-237.428) 180.999,-237.428 ccw(c181.473,-237.428) D51.1@181.138,-237.763 ; K7.4@191.821,-245.567 193.953,-243.436 D53.1@193.953,-238.201 193.953,-237.107 193.314,-236.468 R129.2@193.314,-235.788 ; K7.4@191.821,-245.071 ccw(c191.821,-243.874) 192.668,-244.72 ccw(c193.514,-245.567) K7.4@192.317,-245.567 ; C65.1@192.38,-109.322 C63.1@195.653,-109.322 C56.1@198.926,-109.322 C108.1@202.199,-109.322 C80.1@207.264,-109.322 C79.1@210.53,-109.322 C78.1@213.795,-109.322 C76.1@217.061,-109.322 R108.2@218.694,-109.322 ; D53.1@193.814,-238.64 cw(c193.479,-238.974) 193.953,-238.974 cw(c194.426,-238.974) D53.1@194.091,-238.64 ; D53.1@193.814,-237.763 ccw(c193.479,-237.428) 193.953,-237.428 ccw(c194.426,-237.428) D53.1@194.091,-237.763 ; K1.4@204.519,-245.567 205.883,-244.203 D49.1@205.883,-238.201 205.883,-237.252 205.498,-236.867 R122.2@205.498,-235.788 ; K1.4@204.519,-245.071 ccw(c204.519,-243.874) 205.365,-244.72 ccw(c206.212,-245.567) K1.4@205.015,-245.567 ; v2@204.824,-109.501 ccw(c204.39,-109.935) 204.39,-109.322 ccw(c204.39,-108.708) v2@204.824,-109.142 ; v2@205.183,-109.501 cw(c205.617,-109.935) 205.617,-109.322 cw(c205.617,-108.708) v2@205.183,-109.142 ; D49.1@205.744,-238.64 cw(c205.409,-238.974) 205.883,-238.974 cw(c206.356,-238.974) D49.1@206.021,-238.64 ; D49.1@205.744,-237.763 ccw(c205.409,-237.428) 205.883,-237.428 ccw(c206.356,-237.428) D49.1@206.021,-237.763 ; D52.2@218.437,-199.633 222.945,-199.633 C167.2@222.961,-199.617 223.928,-199.617 225.781,-197.764 229.276,-197.764 P1.9@230.546,-199.034 ; D75.2@218.44,-192.348 218.638,-192.545 229.415,-192.545 P1.15@230.546,-191.414 ; D76.2@219.805,-104.47 219.805,-106.965 218.694,-108.076 R108.2@218.694,-109.322 ; v2@220.318,-109.501 ccw(c219.884,-109.935) 219.884,-109.322 ccw(c219.884,-108.708) v2@220.318,-109.142 ; v2@220.677,-109.501 cw(c221.111,-109.935) 221.111,-109.322 cw(c221.111,-108.708) v2@220.677,-109.142 ; P3.17@230.556,-110.287 P3.18@228.016,-110.287 227.051,-109.322 v2(220.497,-109.322) R108.2@218.694,-109.322
  other v2: 70.739,-201.422 67.64,-201.219 68.936,-200.101 67.488,-198.095 65.329,-197.993 65.786,-196.215 63.525,-196.113 205.003,-109.322
24V_IN: C44.1 C134.2 C135.2 C136.2 C140.2 D26.2 R31.2 R102.2 R182.2 U47.6 U49.1 U49.3 U51.7 | length 242.5
  Top Layer w0.254: R102.2@61.212,-122.087 cw(c60.831,-122.468) 61.369,-122.468 cw(c61.908,-122.468) R102.2@61.527,-122.087 ; 61.369,-130.39 R102.2@61.369,-121.93
  Top Layer w0.508: v4(9.7,-207.289) 19.352,-207.289 20.465,-208.402 ; U49.3@61.796,-140.564 61.796,-142.672 63.497,-144.374 73.226,-144.374 U49.1@77.036,-140.564
  Top Layer w1.016: 83.711,-188.697 83.711,-190.495 86.077,-192.861 R182.2@88.434,-192.861 ; R182.2@88.46,-192.886 C140.2@90.523,-192.886 ; C140.2@90.548,-192.861 U51.7@90.548,-189.538
  Top Layer w2.032: U47.6@20.465,-212.423 20.465,-208.402 v6(20.465,-179.024) v6(20.465,-139.4) ; 83.711,-188.697 v6(83.711,-179.024)
  Bottom Layer w0.508: R31.2@7.974,-207.289 v4(9.7,-207.289)
  Bottom Layer w2.032: v6(20.465,-179.024) v6(83.711,-179.024) ; v6(20.465,-139.4) 60.632,-139.4 U49.3@61.796,-140.564
485_3.3V3: C45.2 FB7.1 R227.2 U12.1 | length 26.8
  Top Layer w0.508: C45.2@173.937,-128.906 v4(175.336,-128.906) v4@175.412,-128.906 ; v4@175.246,-128.817 ccw(c174.846,-128.416) 175.412,-128.416 ; U12.1@177.137,-128.905 177.136,-128.906 v4@175.412,-128.906 ; FB7.1@191.116,-126.793 ccw(c190.696,-127.213) 190.696,-126.619 ccw(c190.696,-126.025) FB7.1@191.116,-126.445 ; FB7.1@191.44,-126.619 176.759,-126.619 175.412,-127.965 v4@175.412,-128.906
  Bottom Layer w0.508: v4@175.362,-128.906 176.507,-127.761 R227.2@179.603,-127.761
485_5V: C46.2 FB8.1 U12.10 U12.16 | length 17.7
  Top Layer w0.508: FB8.1@171.803,-118.897 177.129,-118.897 U12.16@177.137,-118.905 177.137,-120.571 177.952,-121.387 183.54,-121.387 184.757,-120.17 U12.10@184.757,-118.905 ; FB8.1@172.127,-119.071 cw(c172.547,-119.491) 172.547,-118.897 cw(c172.547,-118.304) FB8.1@172.127,-118.723
AC_L: C131.1 U47.2 U48.4 | length 70.1
  Top Layer w2.032: U48.4@-26.088,-134.645 -27.612,-133.121 C131.1@-27.612,-123.698 -24.031,-120.117 21.079,-120.117 ; 23.045,-118.151 21.079,-120.117 ; U47.2@24.915,-116.103 24.915,-116.281 21.079,-120.117
AC_N: C129.2 U47.1 U48.1 | length 70.7
  Top Layer w2.032: U48.1@-21.008,-134.645 -17.706,-131.343 C129.2@-17.706,-123.585 31.708,-123.585 35.075,-120.218 U47.1@35.075,-116.103